# EAGLE board C8 (EAGLE 7.5.0)
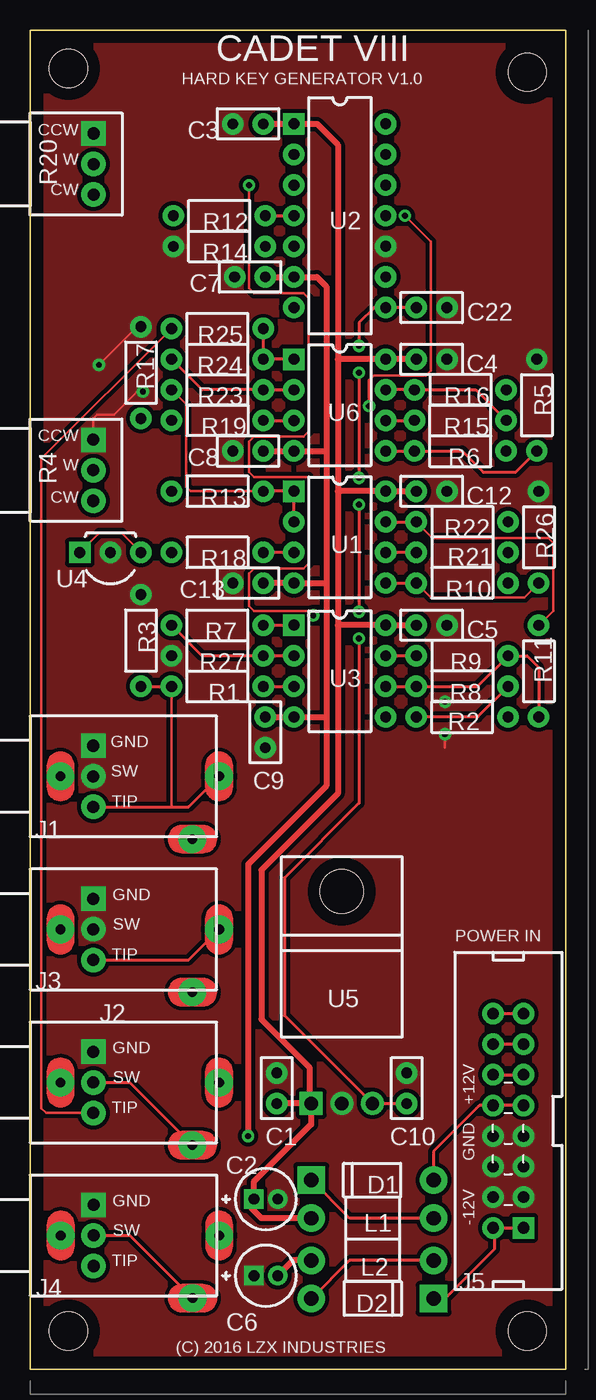
[diagram p0: board, top side]
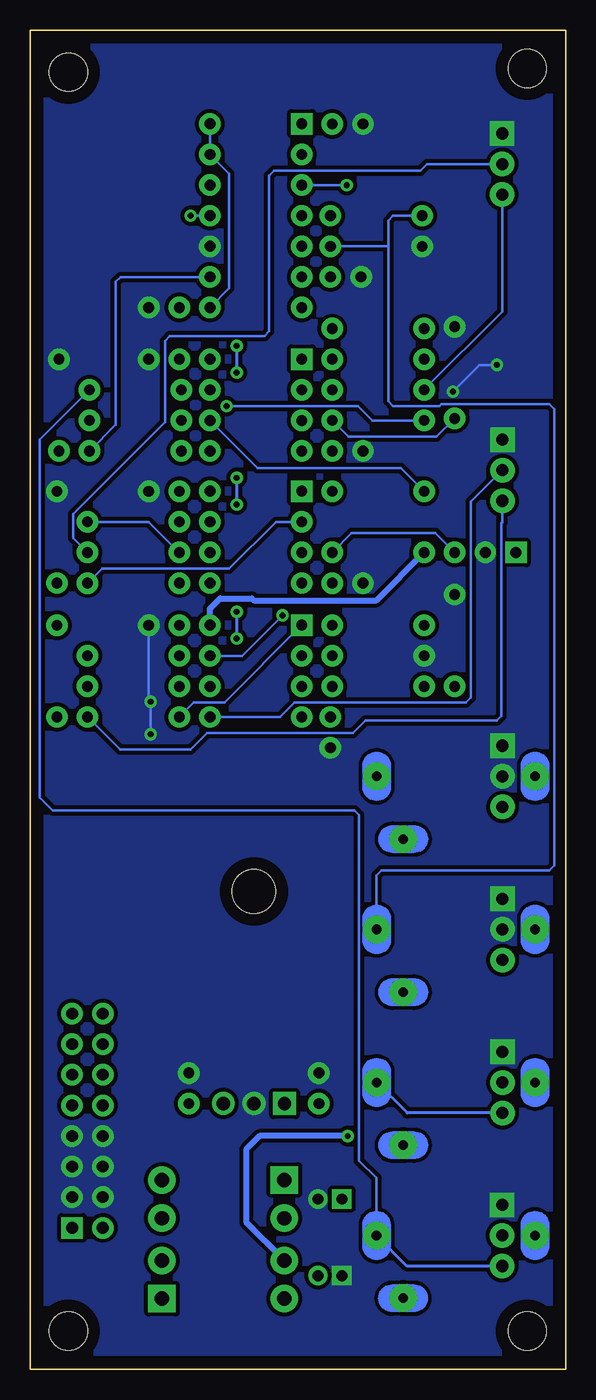
[diagram p1: board, bottom side, seen from below]

Size 44.45 x 111.12 mm. Coordinates in mm from the lower left corner, seen from the top.
Outline: 0,0 44.45,0 44.45,111.12 0,111.12 0,0
Copper layers (1*16): Top 0.035mm / dielectric 1.5mm / Bottom 0.035mm
Design rules "default *": minimum track width 10mil, minimum drill 0.61mm, track to track 8mil, track to pad 8mil, pad to pad 8mil, via to via 8mil, smd to smd 8mil, copper to edge 40mil, drill to drill 8mil, minimum pad ring 0mil, minimum via ring 8mil, stop-mask expansion 2mil, vias tented up to drill 19mil, thermal gap 10mil
Net classes: 0 Default: width 0.203 mm, clearance 0.203 mm, clearance 0.203 mm to class 1; 1 Power Rails: width 0.508 mm, clearance 0.203 mm, clearance 0.203 mm to class 0
Holes 3.17 mm at 3.17,3.18 3.17,107.95 41.27,3.18 41.27,107.63

## Footprints (pad centres in the part's own frame; a part is rotated, then mirrored left to right if it is on the bottom)
CAP-2.54/6.6x3 = drill 0.889 pad 1.778: 1 -1.27,0; 2 1.27,0
CAPPR-2/5.08 = drill 0.9 pad 1.6 square: 1 -0.991,0 | drill 0.9 pad 1.6: 2 0.991,0
CAP-2.54/6.6x3_C3 = drill 0.889 pad 1.778: 1 -1.27,0; 2 1.27,0
CAP-2.54/6.6x3_C4 = drill 0.889 pad 1.778: 1 -1.27,0; 2 1.27,0
CAPPR-2/5.08_C6 = drill 0.9 pad 1.6 square: 1 -0.991,0 | drill 0.9 pad 1.6: 2 0.991,0
CAP-2.54/6.6x3_C7 = drill 0.889 pad 1.778: 1 -1.27,0; 2 1.27,0
CAP-2.54/6.6x3_C22 = drill 0.889 pad 1.778: 1 -1.27,0; 2 1.27,0
DO-41 = drill 1.2 pad 2.286 square: 1 -5.08,0 | drill 1.2 pad 2.286: 2 5.08,0
DO-41_D2 = drill 1.2 pad 2.286 square: 1 -5.08,0 | drill 1.2 pad 2.286: 2 5.08,0
PJ302M = drill 0.8 pad 2.286: 1A 2.54,0; 2A 13.487,-5.207; 3A 15.697,0 | drill 1 pad 2.032 square: 1B 5.258,2.54 | drill 1 pad 2.032: 2B 5.258,0; 3B 5.258,-2.54
PJ302M_J2 = drill 0.8 pad 2.286: 1A 2.54,0; 2A 13.487,-5.207; 3A 15.697,0 | drill 1 pad 2.032 square: 1B 5.258,2.54 | drill 1 pad 2.032: 2B 5.258,0; 3B 5.258,-2.54
PJ302M_J4 = drill 0.8 pad 2.286: 1A 2.54,0; 2A 13.487,-5.207; 3A 15.697,0 | drill 1 pad 2.032 square: 1B 5.258,2.54 | drill 1 pad 2.032: 2B 5.258,0; 3B 5.258,-2.54
IDC16M = drill 0.965 pad 1.778 square: 1 8.89,1.27 | drill 0.965 pad 1.778: 2 8.89,-1.27; 3 6.35,1.27; 4 6.35,-1.27; 5 3.81,1.27; 6 3.81,-1.27; 7 1.27,1.27; 8 1.27,-1.27; 9 -1.27,1.27; 10 -1.27,-1.27; 11 -3.81,1.27; 12 -3.81,-1.27; 13 -6.35,1.27; 14 -6.35,-1.27; 15 -8.89,1.27; 16 -8.89,-1.27
FB-10.16/4.45x3.5 = drill 1.194 pad 2.286: 1 -5.08,0; 2 5.08,0
RES-7.62/5.1x2.5 = drill 0.889 pad 1.778: 1 -3.81,0; 2 3.81,0
RES-7.62/5.1x2.5_R3 = drill 0.889 pad 1.778: 1 -3.81,0; 2 3.81,0
ALPHA9H = drill 1 pad 2.032 square: 1 5.258,2.54 | drill 1 pad 2.032: 2 5.258,0; 3 5.258,-2.54
DIP-8 = drill 0.9 pad 1.778 square: 1 -3.81,3.81 | drill 0.9 pad 1.778: 2 -3.81,1.27; 3 -3.81,-1.27; 4 -3.81,-3.81; 5 3.81,-3.81; 6 3.81,-1.27; 7 3.81,1.27; 8 3.81,3.81
DIP-14 = drill 0.9 pad 1.778 square: 1 -3.81,7.62 | drill 0.9 pad 1.778: 2 -3.81,5.08; 3 -3.81,2.54; 4 -3.81,0; 5 -3.81,-2.54; 6 -3.81,-5.08; 7 -3.81,-7.62; 8 3.81,-7.62; 9 3.81,-5.08; 10 3.81,-2.54; 11 3.81,0; 12 3.81,2.54; 13 3.81,5.08; 14 3.81,7.62
TO-92-100R = drill 0.889 pad 1.778 square: 1 2.54,0 | drill 0.889 pad 1.778: 2 0,0; 3 -2.54,0
TO-220H = drill 1.1 pad 1.9 square: 1 -2.54,0 | drill 1.1 pad 1.9: 2 0,0; 3 2.54,0 | hole 3.6: 0,17.6

## Placement (x,y rotation side)
C1  330n  [CAP-2.54/6.6x3]  20.47,23.33 90 top
C2  10u 25V  [CAPPR-2/5.08]  19.57,14.12 0 top
C3  100n  [CAP-2.54/6.6x3_C3]  18.09,103.35 180 top
C4  100n  [CAP-2.54/6.6x3_C4]  33.33,83.82 0 top
C5  100n  [CAP-2.54/6.6x3_C4]  33.33,61.75 0 top
C6  10u 25V  [CAPPR-2/5.08_C6]  19.57,7.77 0 top
C7  100n  [CAP-2.54/6.6x3_C7]  18.25,90.65 0 top
C8  100n  [CAP-2.54/6.6x3_C7]  18.09,76.2 0 top
C9  100n  [CAP-2.54/6.6x3]  19.52,52.86 90 top
C10  100n  [CAP-2.54/6.6x3]  31.27,23.33 90 top
C12  100n  [CAP-2.54/6.6x3_C4]  33.33,72.86 0 top
C13  100n  [CAP-2.54/6.6x3_C7]  18.09,65.24 0 top
C22  100n  [CAP-2.54/6.6x3_C22]  33.33,88.11 0 top
D1  1N4001  [DO-41]  28.42,15.71 0 top
D2  1N4001  [DO-41_D2]  28.42,5.87 180 top
J1  PJ302M  [PJ302M]  -0.01,49.21 0 top
J2  PJ302M  [PJ302M_J2]  -0.01,23.81 0 top
J3  PJ302M  [PJ302M]  -0.01,36.51 0 top
J4  PJ302M  [PJ302M_J4]  0,11.11 0 top
J5  EUROPWR16  [IDC16M]  39.69,20.63 270 top
L1  68R  [FB-10.16/4.45x3.5]  28.42,12.54 180 top
L2  68R  [FB-10.16/4.45x3.5]  28.42,9.05 180 top
R1  499R  [RES-7.62/5.1x2.5]  15.55,56.67 0 top
R2  4.99K  [RES-7.62/5.1x2.5]  35.87,54.13 0 top
R3  100K  [RES-7.62/5.1x2.5_R3]  9.2,60.48 270 top
R4  B10K  [ALPHA9H]  -0.01,74.61 0 top
R5  1K  [RES-7.62/5.1x2.5_R3]  42.07,80.01 270 top
R6  2.32K  [RES-7.62/5.1x2.5]  35.71,76.2 0 top
R7  1K  [RES-7.62/5.1x2.5]  15.55,61.75 0 top
R8  4.99K  [RES-7.62/5.1x2.5_R3]  35.87,56.67 180 top
R9  4.99K  [RES-7.62/5.1x2.5_R3]  35.87,59.21 180 top
R10  100K  [RES-7.62/5.1x2.5_R3]  35.87,65.24 180 top
R11  4.99K  [RES-7.62/5.1x2.5_R3]  42.22,57.94 270 top
R12  499R  [RES-7.62/5.1x2.5]  15.71,95.73 0 top
R13  49.9K  [RES-7.62/5.1x2.5_R3]  15.55,72.86 180 top
R14  100K  [RES-7.62/5.1x2.5]  15.71,93.19 0 top
R15  1K  [RES-7.62/5.1x2.5]  35.71,78.74 0 top
R16  499R  [RES-7.62/5.1x2.5_R3]  35.71,81.28 180 top
R17  1K  [RES-7.62/5.1x2.5_R3]  9.2,82.71 270 top
R18  4.99K  [RES-7.62/5.1x2.5_R3]  15.55,67.78 180 top
R19  2.32K  [RES-7.62/5.1x2.5_R3]  15.55,78.74 180 top
R20  B10K  [ALPHA9H]  0,100.01 0 top
R21  10K  [RES-7.62/5.1x2.5_R3]  35.87,67.78 180 top
R22  4.99K  [RES-7.62/5.1x2.5_R3]  35.87,70.32 180 top
R23  49.9K  [RES-7.62/5.1x2.5]  15.55,81.28 0 top
R24  1K  [RES-7.62/5.1x2.5]  15.55,83.82 0 top
R25  499R  [RES-7.62/5.1x2.5]  15.55,86.36 0 top
R26  4.99K  [RES-7.62/5.1x2.5_R3]  42.22,69.05 270 top
R27  10K  [RES-7.62/5.1x2.5]  15.55,59.21 0 top
U1  TL072  [DIP-8]  25.71,69.05 0 top
U2  LM361N  [DIP-14]  25.71,95.73 0 top
U3  LM6172  [DIP-8]  25.71,57.94 0 top
U4  TL431  [TO-92-100R]  6.66,67.78 180 top
U5  7805  [TO-220H]  25.87,22.06 0 top
U6  LM6172  [DIP-8]  25.71,80.01 0 top

## Library data of the parts
C1-C10 C12 C13 C22 D1 D2 J5 R1-R3 R5-R19 R21-R27 = common
J1-J4 = common; DATASHEET: http://www.thonk.co.uk/shop/pj302m/
L1 L2 = common; MANUFACTURER: Fair-Rite
R4 R20 = common; DATASHEET: http://www.thonk.co.uk/shop/alpha-9mm-pots/; MANUFACTURER: Alpha
U1 = common; DATASHEET: http://datasheets.diptrace.com\ti\TL07x.pdf; MANUFACTURER: Texas Instruments
U2 = common; MANUFACTURER: National Semiconductor
U3 U6 = common; DATASHEET: http://www.ti.com/lit/gpn/lm6172; MANUFACTURER: Texas Instruments
U4 = common; DATASHEET: http://datasheets.diptrace.com\st_micro\CD00000986.pdf; MANUFACTURER: ST Microelectronics
U5 = common; MANUFACTURER: Atmel

## Nets
0V: C1.2 C2.2 C3.2 C4.2 C5.2 C6.1 C7.1 C8.1 C9.1 C10.2 C12.2 C13.1 C22.2 J1.1A J1.1B J1.2A J1.2B J2.1A J2.1B J3.1A J3.1B J3.2A J3.2B J4.1A J4.1B J5.3 J5.4 J5.5 J5.6 J5.7 J5.8 R3.1 R4.1 R5.1 R14.1 R17.1 R20.1 R26.1 R27.1 U2.10 U4.2 U5.2
+2.5V_Reference: R10.1 R13.1 R20.3 R23.1 U1.1 U1.2
+5V: C10.1 C22.1 U2.8 U2.13 U2.14 U5.3
+12V [Power Rails]: C1.1 C2.1 C3.1 C4.1 C5.1 C12.1 L1.2 R18.2 U1.8 U2.1 U3.8 U5.1 U6.8
-12V [Power Rails]: C6.2 C7.2 C8.2 C9.2 C13.2 L2.2 U1.4 U2.6 U3.4 U6.4
BIAS_CTRL_BUFFERED: R11.1 R22.2 U1.7
BUFFERED_VC_TO_FADER: R9.2 U2.3 U3.7
Net_0: R10.2 R26.2 U1.5
Net_1: D2.2 L2.1
Net_2: D1.1 L1.1
Net_3: R6.2 U2.9
Net_4: R15.2 R16.2 U6.7
Net_5: D2.1 J5.1 J5.2
Net_6: R17.2 R19.1 U6.3
Net_7: R24.2 R25.2 U6.1
Net_8: J4.2A J4.2B
Net_10: R1.2 U3.3
Net_11: R13.2 R15.1 U6.6
Net_12: J2.3A J2.3B R25.1
Net_13: R23.2 R24.1 U6.2
Net_14: R5.2 R6.1 U6.5
Net_16: J4.3A J4.3B R16.1
Net_17: R2.2 R4.3
Net_23: R4.2 U3.5
Net_27: J1.3A J1.3B R1.1 R3.2
Net_28: R20.2 R21.1
Net_32: R12.2 U2.4
Net_33: D1.2 J5.9 J5.10
Net_34: R19.2 U2.11
Net_35: J5.11 J5.12
Net_36: J5.13 J5.14
Net_37: J5.15 J5.16
Net_38: J2.2A J2.2B
Net_50: R18.1 U1.3 U4.1 U4.3
Net_52: R7.1 R27.2 U3.2
Net_53: R2.1 R7.2 R8.1 U3.1
Net_54: R8.2 R9.1 R11.2 U3.6
Net_60: R21.2 R22.1 U1.6
Net_64: J3.3A J3.3B R12.1 R14.2

## Tracks (layer width: path | path; a pad name or v marks a point on that pad's centre or on a via)
0V  (via drill 0.48 pad 1.02)
  Top 0.203: R17.1 8.88,86.52 v5.71,83.34 | v9.36,81.12 8.88,81.12 6.98,79.22 5.55,79.22 5.23,78.9 5.23,77.16 R4.1 | v34.45,55.4 35.56,55.4 | v34.45,52.7 34.45,51.59
  Bottom 0.203: v5.71,83.34 7.14,83.34 v9.36,81.12 | C5.2 34.6,55.56 v34.45,55.4 v34.45,52.7
  pour Top (isolate 0.33): 0.95,110.17 43.34,110.18 43.34,0.95 0.95,0.95 0.95,9.21
  pour Bottom (isolate 0.33): 0.95,110.17 43.34,110.18 43.34,0.95 0.95,0.95 0.95,9.21
+2.5V_Reference
  Top 0.203: R13.1 13.34,72.86 12.94,73.27 12.94,80.08 R23.1
  Top 0.254: U1.2 U1.1 R13.1
  Bottom 0.203: R23.1 5.26,87.76 R20.3 | U1.2 24.04,70.32 27.92,66.44 38.49,66.44 R10.1
+5V  (via drill 0.48 pad 1.02)
  Top 0.254: C10.1 U5.3 21.11,29.36 21.11,40.79 27.3,46.99 v27.3,60.64 | C22.1 U2.8 28.57,88.11 27.3,86.84 v27.3,84.93 | v27.3,82.71 v27.3,73.98 | v27.3,71.75 v27.3,62.86
  Bottom 0.203: U2.8 27.92,89.71 27.92,99.21 U2.13 U2.14
  Bottom 0.254: v27.3,84.93 v27.3,82.71 | v27.3,73.98 v27.3,71.75 | v27.3,62.86 v27.3,60.64
+12V
  Top 0.508: L1.2 19.2,12.54 18.41,13.33 18.41,13.96 C2.1 18.57,15.55 23.33,20.31 U5.1 | U5.1 C1.1 | C5.1 U3.8 25.55,61.75 | C12.1 U1.8 25.55,72.86 | C4.1 U6.8 | U6.8 | C3.1 U2.1 23.81,103.35 25.55,101.6 25.55,83.82 | 25.55,83.82 25.55,72.86 | 25.55,72.86 25.55,61.75 | 25.55,61.75 25.55,47.78 19.2,41.43 19.2,29.04 23.17,25.08 23.17,21.9 U5.1 | U6.8 25.55,83.82
  Bottom 0.508: U3.8 29.52,63.12 28.66,63.97 26.06,63.97 25.87,63.81 15.71,63.81 R18.2
-12V  (via drill 0.48 pad 1.02)
  Top 0.508: L2.2 21.83,9.04 C6.2 | C13.2 U1.4 24.6,65.24 | C8.2 U6.4 24.6,76.2 | C9.2 U3.4 24.6,54.13 | C7.2 U2.6 23.81,90.65 24.6,89.85 24.6,76.2 | 24.6,76.2 24.6,65.24 | 24.6,65.24 24.6,54.13 | 24.6,54.13 24.6,48.41 18.09,41.9 v18.09,19.36
  Bottom 0.508: v18.09,19.36 25.4,19.36 26.51,18.25 26.51,12.21 L2.2
BIAS_CTRL_BUFFERED
  Top 0.203: R22.2 33.41,68.98 43.01,68.98 43.42,68.57 43.42,62.94 R11.1
  Top 0.254: U1.7 R22.2 | R22.2
BUFFERED_VC_TO_FADER  (via drill 0.48 pad 1.02)
  Top 0.203: v18.17,98.27 18.17,89.71 18.58,89.3 22.69,89.3 23.1,88.89 23.1,77.8 22.69,77.39 18.57,77.39 18.17,76.99 18.17,74.47 18.57,74.06 23.1,74.06 23.1,66.84 22.69,66.44 18.57,66.44 18.17,66.03 18.17,63.35 18.57,62.94 23.12,62.94 v23.5,62.56
  Top 0.254: R9.2 U3.7
  Bottom 0.203: U3.7 26.86,59.21 v23.5,62.56 | U2.3 v18.17,98.27
Net_0
  Top 0.203: R10.2 33.26,64.05 41.03,64.05 R26.2
  Top 0.254: U1.5 R10.2
Net_1
  Top 0.254: L2.1 26.52,9.04 D2.2
Net_2
  Top 0.254: L1.1 26.51,12.54 D1.1
Net_3
  Bottom 0.203: R6.2 37.33,78.39 37.33,90.24 36.93,90.65 U2.9
Net_4
  Top 0.254: U6.7 R16.2 36.98,81.28 R15.2 | U6.7
Net_5
  Top 0.254: D2.1 34.45,5.87 38.57,9.99 38.57,11.59 J5.2 J5.1
Net_6
  Top 0.254: R19.1 U6.3
  Bottom 0.203: R19.1 18.01,77.39 10.71,77.39 R17.2
Net_7
  Top 0.254: U6.1 R24.2 R25.2
Net_8
  Top 0.254: J4.2B 8.28,11.11 J4.2A
Net_10
  Top 0.254: R1.2 U3.3
Net_11
  Top 0.254: U6.6 R15.1
  Bottom 0.203: U6.6 25.57,74.79 13.67,74.79 R13.2
Net_12
  Top 0.203: J2.3B 1.35,21.27 0.94,21.67 0.94,75.56 R25.1
  Bottom 0.254: J2.3B 13.15,21.27 J2.3A
Net_13
  Top 0.254: U6.2 R23.2 14.28,81.28 R24.1 | U6.2
Net_14
  Top 0.254: U6.5 R6.1 35.87,76.2 37.62,74.45 40.32,74.45 R5.2
Net_16
  Bottom 0.203: J4.3A 15.7,15.88 17.13,17.32 17.13,45.99 17.54,46.39 42.58,46.39 43.65,47.46 43.65,77.15 R16.1
  Bottom 0.254: J4.3B 13.16,8.57 J4.3A
Net_17
  Bottom 0.203: R2.2 36.98,51.43 31.11,51.43 29.76,52.78 17.65,52.78 16.61,53.82 5.72,53.82 5.31,54.23 5.31,70.21 5.25,70.28 R4.3
Net_23
  Bottom 0.203: R4.2 7.85,72 7.85,55.73 8.26,55.32 22.5,55.32 23.69,54.13 U3.5
Net_27
  Top 0.203: R1.1 11.74,46.67
  Top 0.254: J1.3B 11.74,46.67 13.15,46.67 J1.3A | R3.2 R1.1
Net_28
  Bottom 0.203: R20.2 11.5,100.01 12.05,99.46 24.19,99.46 24.6,99.06 24.6,86.15 25,85.74 32.85,85.74 33.26,85.34 33.26,78.6 40.88,70.98 40.88,68.98 R21.1
Net_32
  Top 0.254: R12.2 U2.4
Net_33
  Top 0.254: J5.9 J5.10 37.3,21.9 33.49,18.09 D1.2
Net_34  (via drill 0.48 pad 1.02)
  Top 0.203: v31.12,95.73 33.26,93.59 33.26,82.88 32.85,82.47 28.55,82.47 28.14,82.07 v28.14,79.93
  Bottom 0.203: v28.14,79.93 17.23,79.93 16.04,78.74 R19.2 | U2.11 v31.12,95.73
Net_35
  Top 0.254: J5.12 J5.11
Net_36
  Top 0.254: J5.13 J5.14
Net_37
  Top 0.254: J5.16 J5.15
Net_38
  Top 0.254: J2.2B 8.27,23.81 J2.2A
Net_50
  Top 0.203: U4.3 7.6,69.38 5.72,69.38 U4.1
  Top 0.254: U1.3 R18.1 | R18.1
  Bottom 0.203: R18.1 17.76,69.38 10.8,69.38 U4.3
Net_52
  Top 0.254: U3.2 R27.2 14.28,59.21 R7.1
Net_53
  Top 0.254: R7.2 U3.1 | R8.1 37.14,54.13 R2.1 | R2.1
  Bottom 0.203: R2.1 30.87,55.32 28.33,55.32 U3.1
Net_54
  Top 0.254: U3.6 R8.2 37.14,56.67 R9.1 41.27,59.21 42.22,58.26 R11.2
Net_60
  Top 0.254: R21.2 U1.6 | U1.6
  Bottom 0.203: R21.2 34.6,70.32 R22.1
Net_64
  Top 0.254: J3.3B 13.15,33.97 J3.3A
  Bottom 0.203: J3.3A 15.69,41 15.28,41.4 1.35,41.4 0.94,41.81 0.94,79.69 1.35,80.09 10.32,80.09 10.47,79.93 14.31,79.93 14.72,80.34 14.72,93.19 | 14.72,93.19 14.72,95.32 14.31,95.73 R12.1 | 14.72,93.19 | 14.72,93.19 R14.2

## Text on the board
tPlace: CADET VIII | HARD KEY GENERATOR V1.0 | CCW | C3 | W | CW | R20 | R12 | U2 | R14 | C7 | C22 | R25 | R24 | C4 | R17 | R23 | R16 | R5 | U6 | CCW | R19 | R15 | W | C8 | R6 | R4 | CW | R13 | C12 | R22 | U1 | R26 | R18 | R21 | U4 | C13 | R10 | R7 | C5 | R3 | R27 | R9 | U3 | R11 | R1 | R8 | GND | R2 | SW | TIP | C9 | J1 | GND | SW | POWER IN | TIP | J3 | U5 | J2 | GND | SW | TIP | +12V | C1 | C10 | GND | C2 | GND | D1 | SW | L1 | -12V | TIP | L2 | J5 | J4 | D2 | C6 | (C) 2016 LZX INDUSTRIES
tDocu: C3 | R20 | R12 | U2 | R14 | C7 | C22 | R25 | R24 | C4 | R17 | R23 | R16 | R5 | U6 | R19 | R15 | C8 | R6 | R4 | R13 | C12 | R22 | U1 | R26 | R18 | R21 | U4 | C13 | R10 | R7 | C5 | R3 | R27 | R9 | U3 | R11 | R1 | R8 | R2 | C9 | J1 | J3 | U5 | J2 | C1 | C10 | C2 | D1 | L1 | L2 | J5 | J4 | D2 | C6